# Altium PCB ButtonPanel.PcbDoc
Units mm, origin at the board's own origin, x right, y up, seen from the top; angles counter-clockwise.
Board outline 50.55 x 65.02 mm, 2 copper layers (Top Layer, Bottom Layer); 20 components, 17 nets, 62 pads, 6 vias.
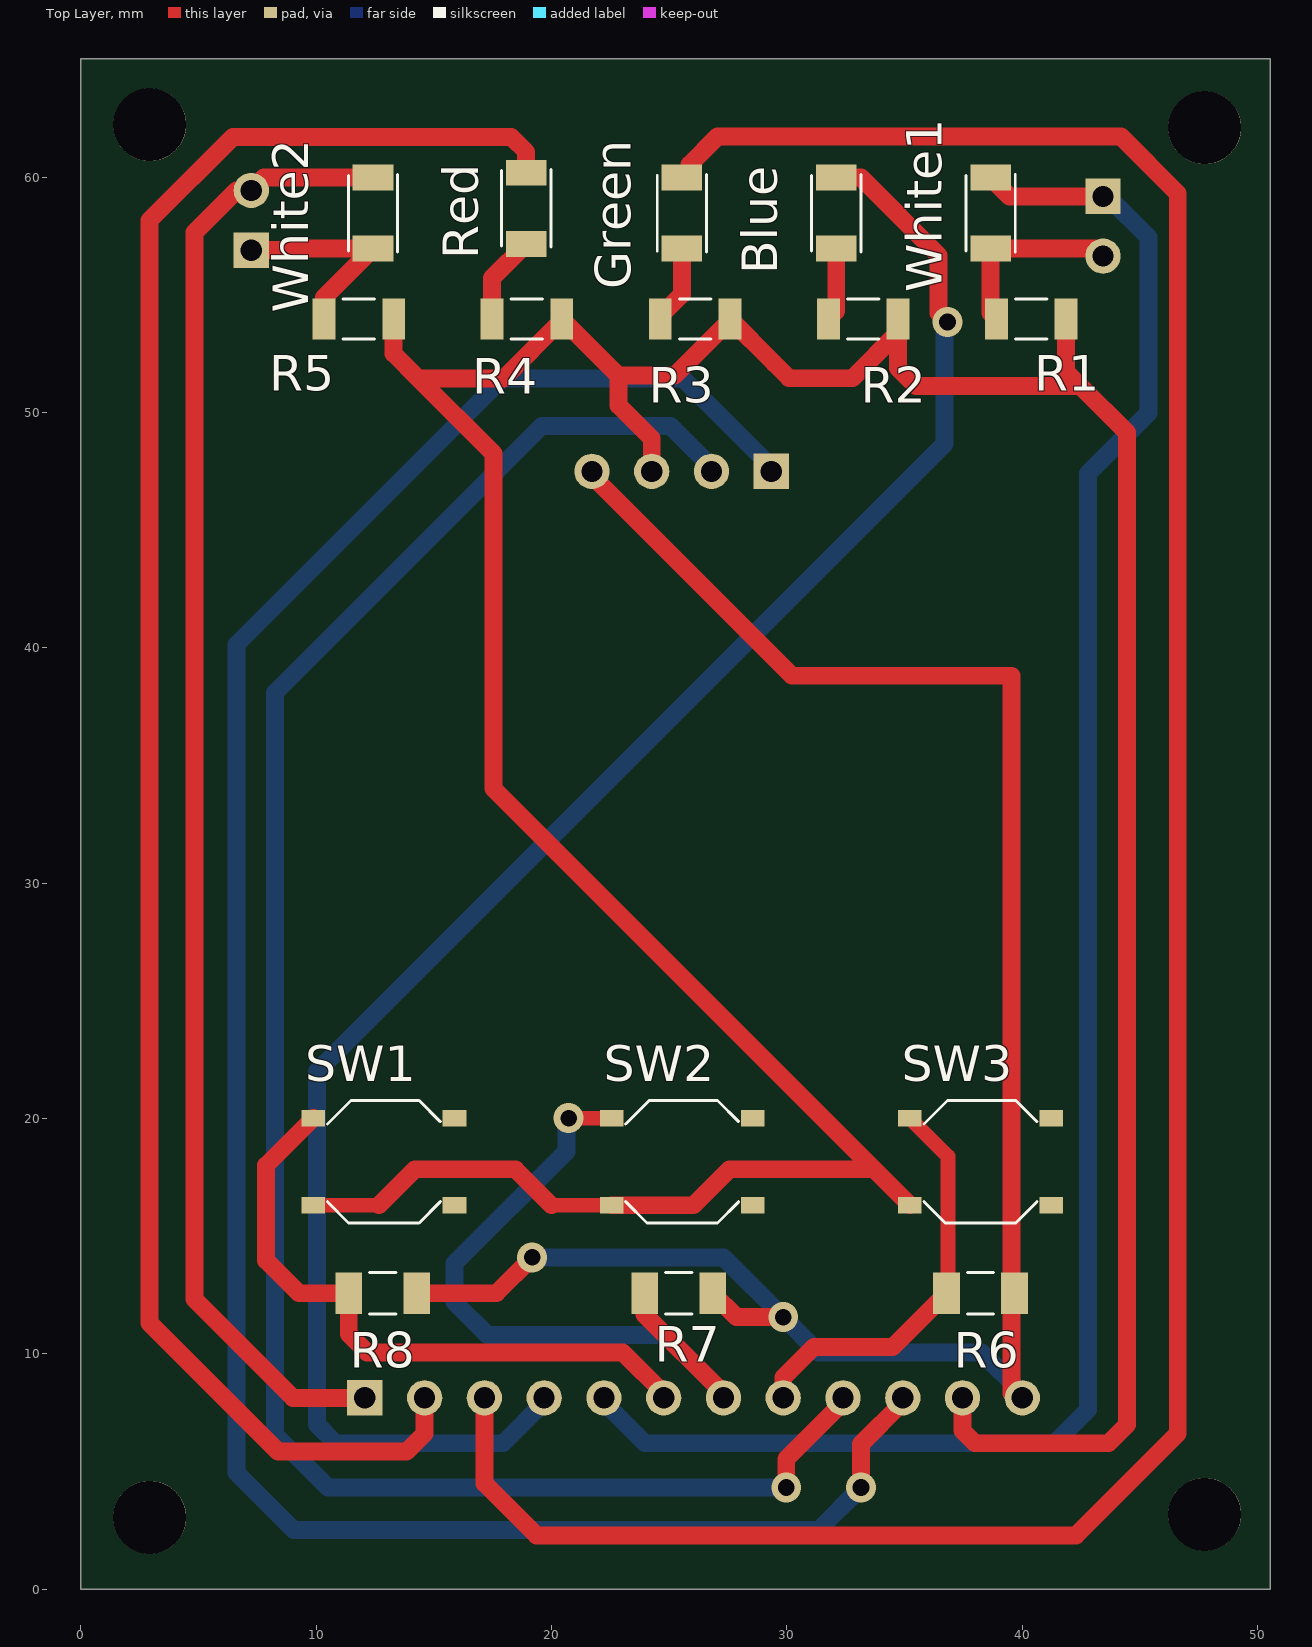
[diagram p0: Top Layer view]
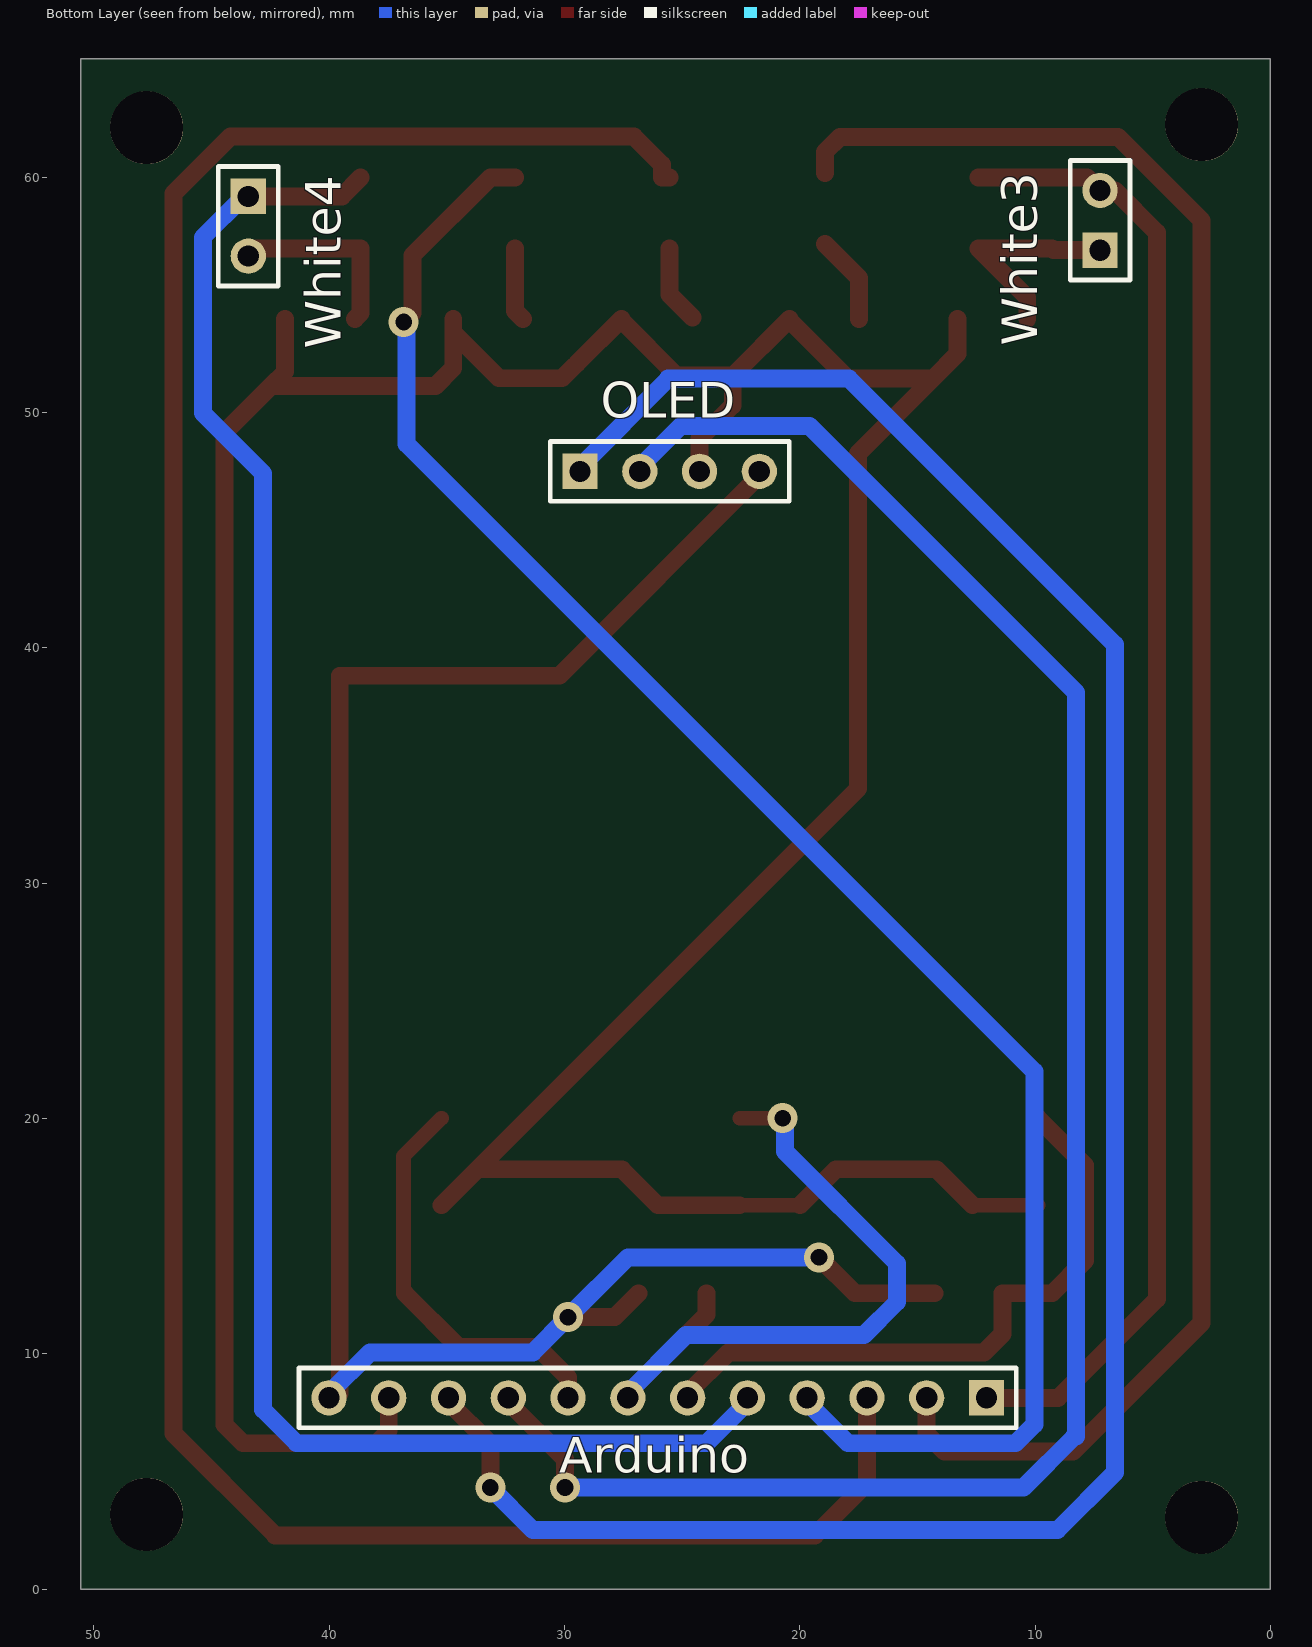
[diagram p1: Bottom Layer view, seen from below]

## Layer stack, top to bottom
Top Solder: solder mask 0.0102, Solder Resist, Dk 3.5
Top Layer: signal copper 0.0356
Dielectric 1: dielectric 0.32, FR-4, Dk 4.8
Bottom Layer: signal copper 0.0356
Bottom Solder: solder mask 0.0102, Solder Resist, Dk 3.5

## Board outline
0,65.024 50.546,65.024 50.546,0 0,0
cut-out: 58.928,81.788

## Design rules (kind name [scope] priority, off if disabled: settings)
Clearance [All] p1: gap=0.8 ignorepadtopadclearanceinfootprint=FALSE except(0: Arc-Hole Track-Hole SMDPad-Hole THPad-Hole Via-Hole Fill-Hole Poly-Hole Region-Hole Text-Hole)
PolygonConnect [All] p1: connectstyle=Relief reliefconductorwidth=0.254 reliefentries=4 polygonreliefangle="90 Angle" airgapwidth=0.254
RoutingVias [All] p1: holewidth=0.711 width=1.27 viastyle="Through Hole" minholewidth=0.711 minwidth=1.27 maxholewidth=0.711 maxwidth=1.27
SMDNeckDown [All] p1: percent=90.000
SolderMaskExpansion [All] p1: expansion=0.102
Width [All] p1: maxlimit=1 minlimit=0.5 preferedwidth=0.762 minimp=50.000000 maximp=50.000000 favimp=50.000000
30 further rules are at their usual default settings.

## Components (designator, comment, footprint, x,y, rotation, side; value= is the part's Value field where it differs from the comment)
Arduino "Header 12" HDR1X12 12.065,8.128 r0 bottom
Blue "LTST-C230KFKT" *LEDC3216X110_LTST-C230KFKT(Primary) 32.098,58.471 r90 top
Green "LTST-C230KFKT" *LEDC3216X110_LTST-C230KFKT(Primary) 25.536,58.471 r90 top
OLED "Header 4" HDR1X4 29.337,47.498 r180 bottom
R1 "Res1" *RESC3116X65N#1 40.386,53.975 r0 top
R2 "Res1" *RESC3116X65N#1 33.242,53.975 r0 top
R3 "Res1" *RESC3116X65N#1 26.098,53.975 r0 top
R4 "Res1" *RESC3116X65N#1 18.955,53.975 r0 top
R5 "Res1" *RESC3116X65N#1 11.811,53.975 r0 top
R6 "Res1" *RESC3116X65N#2 38.227,12.573 r0 top
R7 "Res1" *RESC3116X65N#2 25.4,12.573 r0 top
R8 "Res1" *RESC3116X65N#2 12.827,12.573 r0 top
Red "LTST-C230KFKT" *LEDC3216X110_LTST-C230KFKT(Primary) 18.923,58.674 r90 top
SW1 "SMD-BUTTON(4P-5.2X5.2X1.5MM-SKQGAKE010)" *SW4-SMD-5.2X5.2X1.5MM 12.875,18.161 r0 top
SW2 "SMD-BUTTON(4P-5.2X5.2X1.5MM-SKQGAKE010)" *SW4-SMD-5.2X5.2X1.5MM 25.551,18.161 r0 top
SW3 "SMD-BUTTON(4P-5.2X5.2X1.5MM-SKQGAKE010)" *SW4-SMD-5.2X5.2X1.5MM 38.227,18.161 r0 top
White1 "LTST-C230KFKT" *LEDC3216X110_LTST-C230KFKT(Primary) 38.659,58.471 r90 top
White2 "LTST-C230KFKT" *LEDC3216X110_LTST-C230KFKT(Primary) 12.413,58.471 r90 top
White3 "Header 2" HDR1X2 7.239,56.896 r90 bottom
White4 "Header 2" HDR1X2 43.434,59.182 r270 bottom

## Footprints (in the part's own frame and the unit in brackets; to place one, negate y for a bottom-side part, rotate by r counter-clockwise, add the part's x,y. Pads: shape width x height; smd on the part's side, far side on the other; paste and mask are expansions set on the pad)
*LEDC3216X110_LTST-C230KFKT(Primary) [mm]
  rect 1.1x1.73 smd: A(1.51,0) C(-1.51,0)
  silkscreen extent -1.65,-1.05 1.65,1.04
*RESC3116X65N#1 [mm]
  rect 0.97x1.73 smd: 1(-1.48,0) 2(1.48,0)
  silkscreen extent -0.67,-0.85 0.67,0.85
*RESC3116X65N#2 [mm]
  rect 1.13x1.77 smd: 1(-1.445,0) 2(1.445,0)
  silkscreen extent -0.56,-0.88 0.56,0.88
*SW4-SMD-5.2X5.2X1.5MM [mm]
  rect 1x0.7 smd: 1(-3,1.85) 2(3,1.85) 3(-3,-1.85) 4(3,-1.85)
  silkscreen extent -2.4,-2.6 2.4,2.6
HDR1X2 [mm] "Connector; Header; 2 Position"
  rect 1.5x1.5 hole 0.9: 1(0,0)
  round 1.5 hole 0.9: 2(2.54,0)
  silkscreen extent -1.27,-1.27 3.81,1.27
HDR1X4 [mm] "Connector; Header; 4 Position"
  rect 1.5x1.5 hole 0.9: 1(0,0)
  round 1.5 hole 0.9: 2(2.54,0) 3(5.08,0) 4(7.62,0)
  silkscreen extent -1.27,-1.27 8.89,1.27
HDR1X12 [mm] "Connector; Header; 12 Position"
  rect 1.5x1.5 hole 0.9: 1(0,0)
  round 1.5 hole 0.9: 2(2.54,0) 3(5.08,0) 4(7.62,0) 5(10.16,0) 6(12.7,0) 7(15.24,0) 8(17.78,0) 9(20.32,0) 10(22.86,0) 11(25.4,0) 12(27.94,0)
  silkscreen extent -1.27,-1.27 29.21,1.27

## Part data
Arduino: "Header, 12-Pin", LatestRevisionDate=17-Jul-2002, LatestRevisionNote="Re-released for DXP Platform.", Publisher="Altium Limited"
Blue Green Red White1 White2: "LED; SMD; 1206; orange; 45-90mcd; 3.2x1.6x1.1mm; 130°; 2÷2.4V; 20mA", Package="1206 Lite-On", Availability=Unavailable, MF="Lite-On Inc.", MP=LTST-C230KFKT, Price=None, SnapEDA_Link=https://www.snapeda.com/parts/LTST-C230KFKT/Lite-On%20Inc./view-part/?ref=snap
OLED: "Header, 4-Pin", LatestRevisionDate=17-Jul-2002, LatestRevisionNote="Re-released for DXP Platform.", Publisher="Altium Limited"
R1 R2 R3 R4 R5: library part RT1206DRE07330RL, "RES SMD 330 OHM 0.5% 1/4W 1206", Package="3116 Yageo", Availability=Unavailable, MF=Yageo, MP=RT1206DRE07330RL, Price=None, SnapEDA_Link=https://www.snapeda.com/parts/RT1206DRE07330RL/Yageo/view-part/?ref=snap
R6 R7 R8: library part MCA1206MD1002DP500, "RES SMD 10K OHM 0.5% 0.4W 1206", Package="3116 Vishay", Availability=Unavailable, MF=Vishay, MP=MCA1206MD1002DP500, Price=None, SnapEDA_Link=https://www.snapeda.com/parts/MCA1206MD1002DP500/Vishay/view-part/?ref=snap
SW1 SW2 SW3: "Switch Tactile N.O. SPST Button Gull Wing 0.05A 12VDC 3.43N SMD T/R", Package=None, Availability=Unavailable, MF=ALPS, MP=SKQGAKE010, Price=None, SnapEDA_Link=https://www.snapeda.com/parts/SKQGAKE010/ALPS/view-part/?ref=snap
White3 White4: "Header, 2-Pin", LatestRevisionDate=17-Jul-2002, LatestRevisionNote="Re-released for DXP Platform.", Publisher="Altium Limited"

## Free pads (board coordinates)
  round 3.1 hole 3.1 unplated: 2(2.921,62.23) 4(47.752,62.103) 5(2.921,3.048) 6(47.752,3.175)

## Via types
v1: diameter 1.27, hole 0.711, Top Layer to Bottom Layer, 6 vias

## Nets (pads, with @x,y where several pads share a name; then routed paths per layer and width w, separated by ;. In a path a pad name is that pad's centre, name@x,y a point inside that pad or via, vN(x,y) a via of type N, cw(c..) or ccw(c..) an arc to the next point about the centre after c; other vN are vias at no path point)
+5V: Arduino.12 OLED.4 R6.2 R7.2 R8.2 | length 84.9
  Top Layer w0.762: R8.2 17.653,12.573 v1(19.177,14.097) ; OLED.4 21.717,47.307 30.211,38.813 39.546,38.813 39.546,8.319 39.814,8.319 Arduino.12 ; R7.2 27.861,11.557 v1(29.845,11.557)
  Bottom Layer w0.762: v1(19.177,14.097) 27.305,14.097 v1(29.845,11.557) 31.343,10.059 38.265,10.059 40.005,8.319 Arduino.12
Button1: Arduino.8 R6.1 SW3.1 | length 17.4
  Top Layer w0.63: SW3.1 36.842,18.396 36.842,12.573 R6.1
  Top Layer w0.762: Arduino.8 29.845,8.989 31.143,10.287 34.496,10.287 R6.1
Button2: Arduino.7 R7.1 SW2.1 | length 30.8
  Top Layer w0.63: v1(20.726,20.011) SW2.1
  Top Layer w0.762: R7.1 23.955,11.669 27.305,8.319 Arduino.7
  Bottom Layer w0.762: v1(20.726,20.011) 20.629,20.011 20.629,18.597 15.875,13.843 15.875,12.192 17.272,10.795 24.829,10.795 27.305,8.319 Arduino.7
Button3: Arduino.6 R8.1 SW1.1 | length 27.3
  Top Layer w0.762: SW1.1 7.874,18.01 7.874,13.97 9.271,12.573 R8.1 11.382,10.843 12.166,10.059 23.025,10.059 24.765,8.319 Arduino.6
GND: Arduino.11 OLED.3 R1.2 R2.2 R3.2 R4.2 R5.2 SW1.3 SW2.3 SW3.3 | length 169.6
  Top Layer w0.63: SW1.3 12.663,16.311 ; 19.99,16.311 SW2.3
  Top Layer w0.762: 12.663,16.311 14.194,17.842 18.459,17.842 19.99,16.311 ; R5.2 13.291,52.495 14.351,51.435 ; SW2.3 26.031,16.311 27.562,17.842 33.696,17.842 ; OLED.3 24.257,48.895 22.848,50.304 22.848,51.562 ; 29.464,52.09 R3.2 27.579,53.915 25.226,51.562 22.848,51.562 ; 29.591,51.963 30.099,51.455 32.786,51.455 R2.2@34.722,53.391 ; R2.2 R2.2@34.722,53.391 ; SW3.3 33.696,17.842 ; Arduino.11@37.465,8.319 Arduino.11 37.465,6.731 37.999,6.197 43.662,6.197 44.45,6.985 44.45,49.149 42.469,51.13 ; R1.2 41.866,51.733 42.469,51.13 ; 14.351,51.435 17.526,48.26 17.526,34.012 33.696,17.842 ; 14.351,51.435 17.955,51.435 20.435,53.915 R4.2 22.848,51.562 ; R2.2@34.722,53.391 34.722,51.892 35.484,51.13 42.469,51.13
LED1: Arduino.4 Blue.A | length 77.6
  Top Layer w0.762: Blue.A 33.147,59.981 36.449,56.679 36.449,54.229 v1(36.83,53.848)
  Bottom Layer w0.762: Arduino.4 19.685,7.937 17.945,6.197 10.826,6.197 10.033,6.99 10.033,21.996 36.703,48.666 36.703,53.721 v1(36.83,53.848)
LED2: Arduino.3 Green.A | length 111.6
  Top Layer w0.762: Arduino.3 17.145,4.496 19.355,2.286 42.29,2.286 46.609,6.605 46.609,59.309 44.196,61.722 27.051,61.722 25.857,60.528 25.857,59.981 Green.A
LED3: Arduino.2 Red.A | length 81.3
  Top Layer w0.762: Arduino.2 14.605,6.604 13.843,5.842 8.382,5.842 2.921,11.303 2.921,58.166 6.467,61.712 18.288,61.712 18.923,61.077 Red.A
NetBlue_C: Blue.C R2.1 | length 3.1
  Top Layer w0.762: R2.1 32.098,54.31 Blue.C
NetGreen_C: Green.C R3.1 | length 3.3
  Top Layer w0.762: R3.1@24.555,54.038 25.536,55.019 Green.C
NetR1_1: R1.1 White1.C White4.2 | length 8
  Top Layer w0.762: R1.1 38.659,54.222 White1.C 43.115,56.961 White4.2
NetR4_1: R4.1 Red.C | length 3.8
  Top Layer w0.762: R4.1 17.475,55.716 Red.C
NetR5_1: R5.1 White2.C White3.1 | length 9
  Top Layer w0.762: White3.1 9.22,56.896 9.285,56.961 White2.C 10.331,54.879 R5.1
SCL: Arduino.9 OLED.2 | length 83.2
  Top Layer w0.762: v1(29.972,4.318) 29.972,5.524 32.385,7.937 Arduino.9
  Bottom Layer w0.762: OLED.2 26.797,47.689 25.057,49.429 19.584,49.429 8.255,38.1 8.255,6.477 8.337,6.477 10.496,4.318 v1(29.972,4.318)
SDA: Arduino.10 OLED.1 | length 97.2
  Top Layer w0.762: v1(33.147,4.318) 33.147,6.159 34.925,7.937 Arduino.10
  Bottom Layer w0.762: OLED.1 29.337,47.689 25.591,51.435 17.907,51.435 6.604,40.132 6.604,4.953 9.055,2.502 31.331,2.502 v1(33.147,4.318)
White1: Arduino.5 White1.A White4.1 | length 80.7
  Top Layer w0.762: White1.A 39.458,59.182 White4.1
  Bottom Layer w0.762: Arduino.5 22.225,7.937 23.965,6.197 41.376,6.197 42.799,7.62 42.799,47.411 45.365,49.977 45.365,57.442 43.625,59.182 White4.1
White2: Arduino.1 White2.A White3.2 | length 62.9
  Top Layer w0.762: Arduino.1 9.017,8.128 4.826,12.319 4.826,57.653 6.609,59.436 White3.2 7.784,59.981 White2.A
pads on no net: SW1.2 SW1.4 SW2.2 SW2.4 SW3.2 SW3.4

## Silkscreen, mask and mechanical layers (free items; w line width, h text height)
Mechanical 1:
  the board outline again, w0.254